# Altium PCB April12_RevB_PCB.PcbDoc
Units mil, origin at the board's own origin, x right, y up, seen from the top; angles counter-clockwise.
Board outline 1535 x 3155 mil, 2 copper layers (Top Layer, Bottom Layer); 35 components, 15 nets, 120 pads, 32 vias.
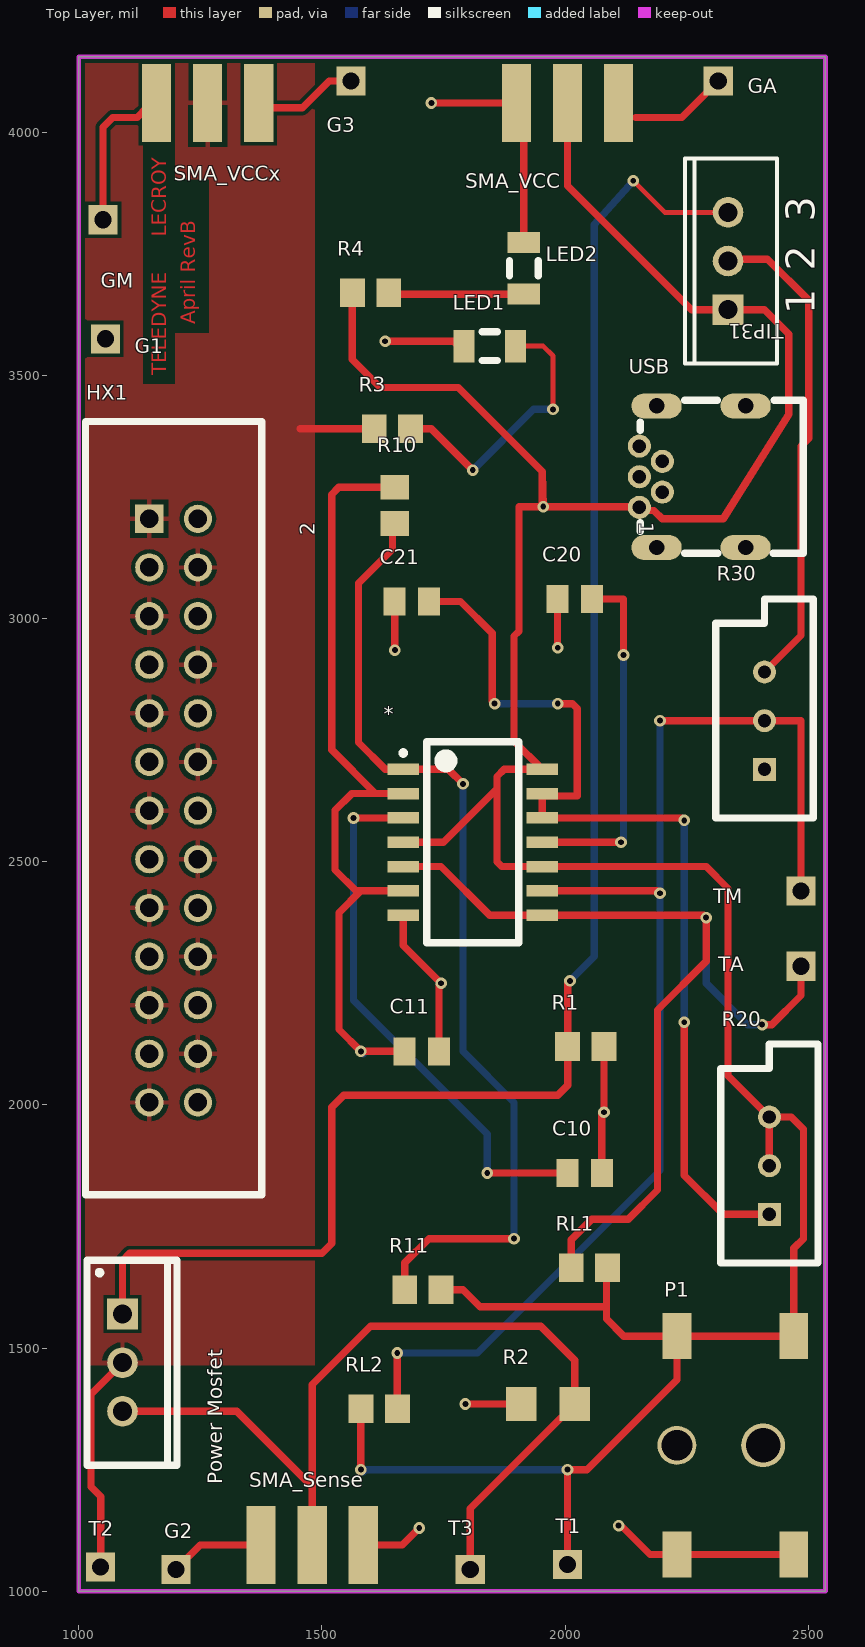
[diagram p0: Top Layer view]
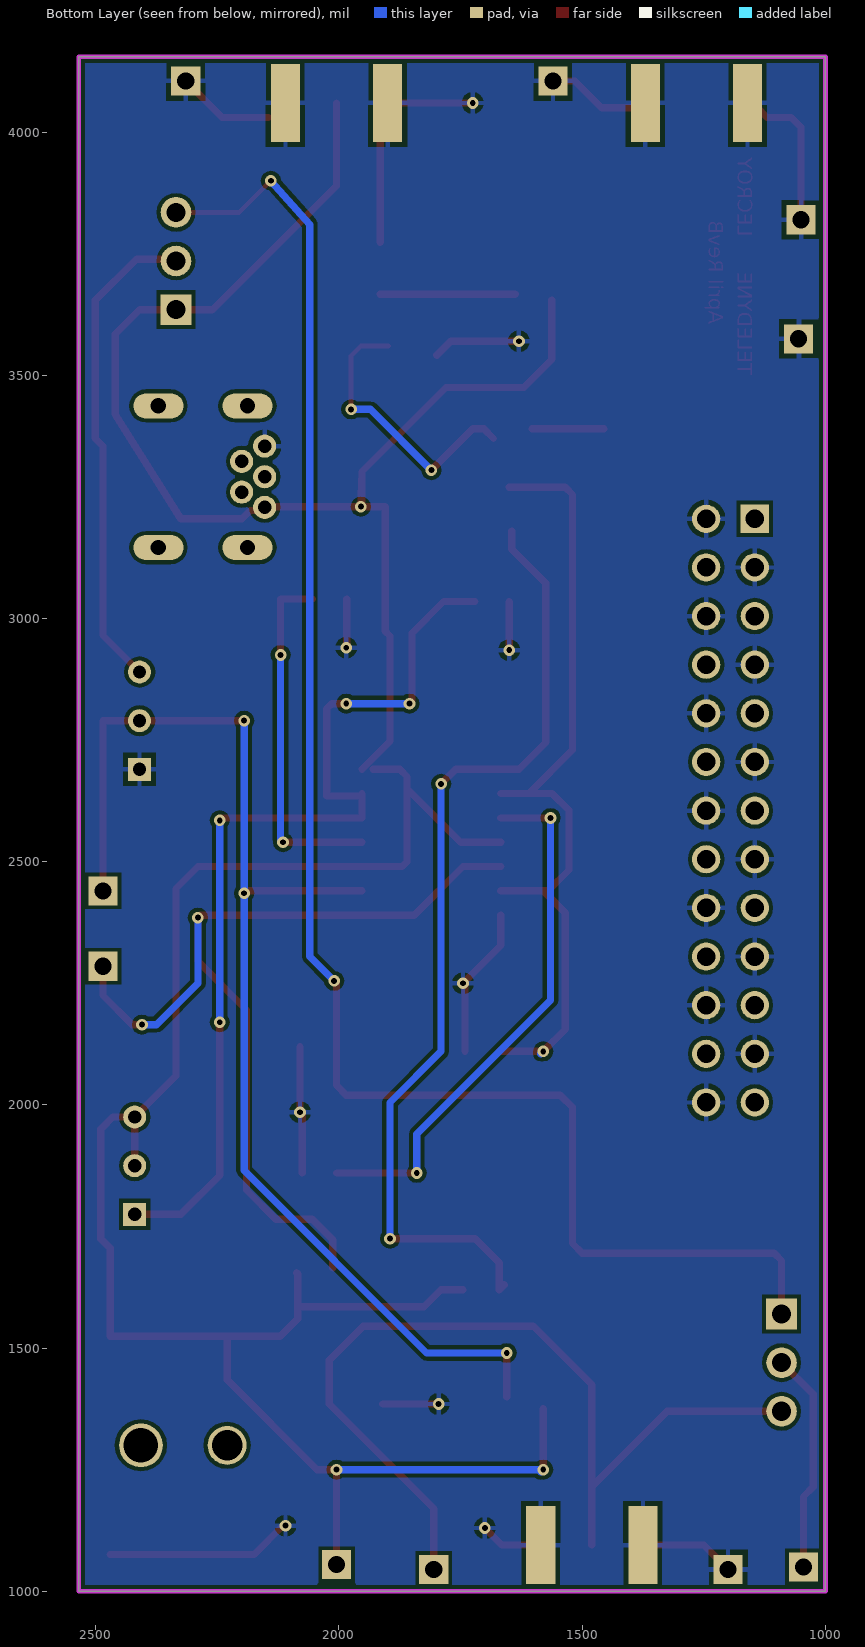
[diagram p1: Bottom Layer view, seen from below]

## Layer stack, top to bottom
Top Solder: solder mask 0.4, Solder Resist, Dk 3.5
Top Layer: signal copper 1.4
Dielectric 1: dielectric 12.6, FR-4, Dk 4.8
Bottom Layer: signal copper 1.4
Bottom Solder: solder mask 0.4, Solder Resist, Dk 3.5

## Board outline
1000,1000 2535,1000 2535,4155 1000,4155

## Design rules (kind name [scope] priority, off if disabled: settings)
Clearance [All] p1: gap=8 ignorepadtopadclearanceinfootprint=FALSE except(0: Arc-Hole Track-Hole SMDPad-Hole THPad-Hole Via-Hole Fill-Hole Poly-Hole Region-Hole Text-Hole)
PolygonConnect [All] p1: connectstyle=Relief reliefconductorwidth=10 reliefentries=4 polygonreliefangle="90 Angle" airgapwidth=10
RoutingVias [All] p1: holewidth=12 width=24 viastyle="Through Hole" minholewidth=12 minwidth=24 maxholewidth=12 maxwidth=24
SolderMaskExpansion [All] p1: expansion=4
Width [All] p1: maxlimit=20 minlimit=10 preferedwidth=10 minimp=50.000000 maximp=50.000000 favimp=50.000000
30 further rules are at their usual default settings.

## Components (designator, comment, footprint, x,y, rotation, side; value= is the part's Value field where it differs from the comment)
* "556" "556 timer" 1810,2540 r0 top
C10 "Cap Semi" CAPC2012X140N 2040,1860 r0 top value=0.01uF
C11 "Cap Semi" CAPC2012X140N 1705.43,2110 r0 top value=10uF
C20 "Cap Semi" CAPC2012X140N 2019.57,3040 r0 top value=0.01uF
C21 "Cap Semi" CAPC2012X140N 1685,3035 r0 top value=10uF
G1 "VCC" "1Pin Header" 1055,3575 r0 top
G2 "VCCx" "1Pin Header" 1200,1045 r0 top
G3 "Sense" "1Pin Header" 1560,4105 r0 top
GA "VCCx" "1Pin Header" 2315,4105 r0 top
GM "VCC" "1Pin Header" 1050,3820 r0 top
HX1 "1761606-9" TYCO_1761606-9 1245,3205 r90 top
LED1 "LED2" C1206 1845,3560 r180 top
LED2 "LED2" C1206 1915,3720 r90 top
P1 "PJ-002AH-SMT-TR" CUI_PJ-002AH-SMT-TR 2350,1300 r0 top
"Power Mosfet" "NMOS-2" TO-220AB 1090,1470 r270 top
R1 "Res3" RESC2012X70 2042.6,2120 r0 top value=100
R2 "0.1ohm" RESC3216X65 1964.88,1385 r180 top
R3 "Res3" RESC2012X70 1645,3390 r180 top value=1K
R4 "Res3" RESC2012X70 1600,3670 r180 top value=1K
R10 "Res3" RESC2012X70 1650,3232.4 r270 top value=440
R11 "Res3" RESC2012X70 1707.6,1620 r0 top value=560
R20 "RPot" VR5 2420,1875 r90 top value=10
R30 "RPot" VR5 2410,2790 r90 top value=10K
RL1 "Res3" RESC2012X70 2050,1665 r0 top value=10K
RL2 "Res3" RESC2012X70 1617.6,1375 r0 top value=10k
SMA_Sense "SMA3" sma_UserDefined 1220,1235 r180 top
SMA_VCC "SMA1" sma_UserDefined 1745,4200 r180 top
SMA_VCCx "SMA2" sma_UserDefined 1525,3920 r0 top
T1 "VCC" "1Pin Header" 2005,1055 r0 top
T2 "VCCx" "1Pin Header" 1045,1050 r0 top
T3 "Sense" "1Pin Header" 1805,1045 r0 top
TA "VCC" "1Pin Header" 2485,2285 r0 top
TIP31 "NPN" TO-220-AB 2335,3735 r90 top
TM "VCC" "1Pin Header" 2485,2440 r0 top
USB "USB" 651005136521_651005136521(Primary) 2188.19,3291.5 r270 top

## Footprints (in the part's own frame and the unit in brackets; to place one, negate y for a bottom-side part, rotate by r counter-clockwise, add the part's x,y. Pads: shape width x height; smd on the part's side, far side on the other; paste and mask are expansions set on the pad)
"1Pin Header" [mil]
  rect 60x60 hole 35.43: 1(0,0)
"556 timer" [mm]
  rect 1.65x0.6 smd: 1(-3.625,3.81) 2(-3.625,2.54) 3(-3.625,1.27) 4(-3.625,0) 5(-3.625,-1.27) 6(-3.625,-2.54) 7(-3.625,-3.81) 8(3.625,-3.81) 9(3.625,-2.54) 10(3.625,-1.27) 11(3.625,0) 12(3.625,1.27) 13(3.625,2.54) 14(3.625,3.81)
  silkscreen extent -3.75,-5.25 2.4,5.25, body extent -2.8,-5.25 2.8,5.25, height 2
651005136521_651005136521(Primary) [mm]
  round 1.208 hole 0.7: 1(1.6,-0.9) 2(0.8,0.3) 3(0,-0.9) 4(-0.8,0.3) 5(-1.6,-0.9)
  oval 1.308x2.616 hole 0.8: SHELL(-3.7,0) SHELL1(3.7,0) SHELL2(-3.7,4.65) SHELL3(3.7,4.65)
  silkscreen extent -4,-0.85 4,7.65
C1206 [mm] "Chip Capacitor, Body 3.2x1.6mm, IPC High Density"
  rect 1.1x1.7 smd: 1(-1.35,0) 2(1.35,0)
  silkscreen extent -0.4,-0.75 0.4,0.75, body extent -1.7,-0.9 1.7,0.9, height 1.3
CAPC2012X140N [mm]
  rect 1.15x1.45 smd: 1(-0.9,0) 2(0.9,0)
CUI_PJ-002AH-SMT-TR [mm]
  rect 1.5x2.4 smd: 1(-3.05,5.7) 1(3.05,5.7) 2(-3.05,-5.7) 3(3.05,-5.7)
  round 2.032 hole 1.6 unplated: None(-3.05,0)
  round 2.286 hole 1.8 unplated: None(1.45,0)
RESC2012X70 [mm]
  rect 1.3x1.5 smd: 1(-0.95,0) 2(0.95,0)
RESC3216X65 [mm]
  rect 1.6x1.8 smd: 1(-1.4,0) 2(1.4,0)
sma_UserDefined [mil]
  rect 60x160 smd: GND1(-365,140) GND4(-155,140) P(-260,140)
  rect 60x160 smd far side: GND2(-365,140) GND3(-155,140)
TO-220-AB [mm] "TO, Thru-Hole, Vertical, Heatsink Mounted; 3 In-Line Leads; Pitch 2.54 mm"
  rect 1.6x1.6 hole 1: 1(-2.54,0)
  round 1.6 hole 1: 2(0,0) 3(2.54,0)
  silkscreen extent -5.35,-2.55 5.35,2.25
TO-220AB [mm] "TO, Thru-Hole, Vertical, Heatsink Mounted; 3 In-Line Leads; Pitch 2.54 mm"
  rect 1.6x1.6 hole 1: 1(-2.54,0)
  round 1.6 hole 1: 2(0,0) 3(2.54,0)
  silkscreen extent -5.35,-1.85 5.35,2.85, body extent -5.4,-1.9 5.4,2.9, height 19.3
TYCO_1761606-9 [mil]
  rect 58x58 hole 38: 1(0,100)
  round 58 hole 38: 2(0,0) 3(-100,100) 4(-100,0) 5(-200,100) 6(-200,0) 7(-300,100) 8(-300,0) 9(-400,100) 10(-400,0) 11(-500,100) 12(-500,0) 13(-600,100) 14(-600,0) 15(-700,100) 16(-700,0) 17(-800,100) 18(-800,0) 19(-900,100) 20(-900,0) 21(-1000,100) 22(-1000,0) 23(-1100,100) 24(-1100,0) 25(-1200,100) 26(-1200,0)
  silkscreen extent -1390,-131 200,231
VR5 [mm] "Thru-Hole; 3 Leads"
  rect 1.2x1.2 hole 0.7: 1(-2.54,0)
  round 1.2 hole 0.7: 2(0,0) 3(2.54,0)
  silkscreen extent -5.08,-2.54 6.35,2.54

## Part data
C10 C11 C20 C21: "Capacitor (Semiconductor SIM Model)", LatestRevisionDate=29-May-2009, LatestRevisionNote="IPC-7351 Footprint Added.", PackageDescription="Chip Capacitor", PackageReference=C1206, Published=8-Jun-2000, Publisher="Altium Limited"
G1 G2 G3 GA GM T1 T2 T3 TA TM: library part "1Pin Header"
HX1: "Header, Pin, Idc, Amp-Latch, 26 Pos, Low Profile, Pcb, Vertical, Black", Package=None, Availability=Good, EU_RoHS_Compliance=Compliant, Link=http://www.te.com/usa-en/product-1761606-9.html, MF="TE Connectivity", MP=1761606-9, Price="4.02 USD", SnapEDA_Link=https://www.snapeda.com/symbols-footprints/1761606-9/TE%20Connectivity%20AMP%20Connectors/view-part/?ref=snap
LED1 LED2: "Typical RED, GREEN, YELLOW, AMBER GaAs LED", LatestRevisionDate=17-Jul-2002, LatestRevisionNote="Re-released for DXP Platform.", PackageDescription="SM LED; 2 Flat Leads", PackageReference=3.2X1.6X1.1, PackageVersion=Feb-2002, Published=8-Jun-2000, Publisher="Altium Limited"
P1: "24 VDC 5 A Surface Mount Unshielded 2 Conductors 3 Contacts Male Power Jack", Package=None, Availability=Good, MF=CUI, MP=PJ-002AH-SMT-TR, Price="1.03 USD", SnapEDA_Link=https://www.snapeda.com/symbols-footprints/PJ-002AH-SMT-TR/CUI%20Inc/view-part/?ref=snap
"Power Mosfet": "N-Channel Power MOSFET", ComponentLink1Description="Manufacturer Link", ComponentLink1URL=http://www.irf.com/, DatasheetVersion=PD-9.814, LatestRevisionDate=17-Jul-2002, LatestRevisionNote="Re-released for DXP Platform.", Note="Pin 2 is electrically connected to pin 4.", PackageDescription="TO, Thru-Hole, Vertical, Heatsink Mounted; 3 In-Line Leads; Pitch 2.54 mm", PackageReference=TO-220AB, PackageVersion=Feb-1997, Published=8-Jun-2000, Publisher="Altium Limited"
R1 R3 R4 R10 R11 RL1 RL2: "Resistor", LatestRevisionDate=29-May-2009, LatestRevisionNote="IPC-7351 Footprint Added.", PackageDescription="Chip Resistor", PackageReference=J1-0603, Published=8-Jun-2000, Publisher="Altium Limited"
R2: library part Res3, "Resistor", LatestRevisionDate=29-May-2009, LatestRevisionNote="IPC-7351 Footprint Added.", PackageDescription="Chip Resistor", PackageReference=J1-0603, Published=8-Jun-2000, Publisher="Altium Limited"
R20 R30: "Potentiometer", LatestRevisionDate=17-Jul-2002, LatestRevisionNote="Re-released for DXP Platform.", PackageDescription="Variable Resistor, Thru-Hole; 3 Leads", PackageReference=VR5, Published=8-Jun-2000, Publisher="Altium Limited", Set Position=0.5, Sim Note="Enter the Resistance value and the set point into parameter fields."
SMA_Sense SMA_VCC SMA_VCCx: library part 1865, "Edge-Launch SMA Connector for 1.6mm / 0.062 Thick PCBs", Package=None, Availability=Bad, MF=Keystone, MP=1865, Price="2.38 USD", SnapEDA_Link=https://www.snapeda.com/symbols-footprints/1865/Keystone%20Electronics/view-part/?ref=snap
TIP31: "NPN Bipolar Transistor", Code_JEDEC=TO-226-AA, LatestRevisionDate=17-Jul-2002, LatestRevisionNote="Re-released for DXP Platform.", PackageDescription="TO, Flat Index; 3 In-Line, Axial Leads; Body Dia. 4.8mm; Leads 0.55 x 0.51 mm (max)", PackageReference=TO-226-AA, Published=8-Jun-2000, Publisher="Altium Limited"
USB: library part 651005136521, "MINI USB A - 5POS Horizontal through hole", Package=None, Availability=Good, MF="Wurth Electronics", MP=651005136521, Price="1.78 USD", SnapEDA_Link=https://www.snapeda.com/symbols-footprints/651005136521/Wurth%20Electronics%20Inc/view-part/?ref=snap

## Via types
v1: diameter 24, hole 12, Top Layer to Bottom Layer, 32 vias

## Nets (pads, with @x,y where several pads share a name; then routed paths per layer and width w, separated by ;. In a path a pad name is that pad's centre, name@x,y a point inside that pad or via, vN(x,y) a via of type N, cw(c..) or ccw(c..) an arc to the next point about the centre after c; other vN are vias at no path point)
GND: *.7 C10.2 C11.2 C20.1 C21.1 G1.1 G2.1 G3.1 GA.1 GM.1 HX1.2 HX1.3 HX1.6 HX1.7 HX1.10 HX1.11 HX1.14 HX1.15 HX1.18 HX1.19 HX1.22 HX1.23 HX1.26 LED1.2 LED2.2 P1.2 P1.3 R1.2 R2.2 R30.1 SMA_Sense.GND1 SMA_Sense.GND2 SMA_Sense.GND3 SMA_Sense.GND4 SMA_VCC.GND1 SMA_VCC.GND2 SMA_VCC.GND3 SMA_VCC.GND4 SMA_VCCx.GND1 SMA_VCCx.GND2 SMA_VCCx.GND3 SMA_VCCx.GND4 USB.5 | length 2948.8
  Top Layer w15: GM.1 1050,4010 1070,4030 1120,4030 SMA_VCCx.GND1@1140,4050 ; G2.1 1250,1095 SMA_Sense.GND4 ; SMA_VCCx.GND4@1350,4050 1460,4050 1515,4105 G3.1 ; SMA_Sense.GND1 1665,1095 v1(1700,1130) ; v1(1630,3570) 1770.31,3570 LED1.2@1798.75,3541.56 ; C21.1 1649.57,2935.43 v1(1650,2935) ; *.7 1667.28,2327.72 v1(1745,2250) 1740.87,2245.87 C11.2 ; v1(1725,4060) SMA_VCC.GND4 ; v1(1795,1385) R2.2 ; LED2.2 SMA_VCC.GND4@1915,4035 ; C20.1 1984.13,2940.87 v1(1985,2940) ; C10.2 2075.43,1979.57 2080,1984.13 v1(2080,1985) R1.2 ; v1(2110,1135) 2115,1135 2174.41,1075.59 P1.2 P1.3 ; 2145,4030 2240,4030 GA.1
Net*_1: *.1 R10.2 R11.1 | length 2007.7
  Top Layer w15: R10.2@1645,3180 1645,3142.6 1575,3072.6 1575,2745 1630,2690 *.1 1760,2690 v1(1790,2660) ; R11.1@1660,1630.2 R11.1 1670.2,1675.2 1720,1725 v1(1895,1725)
  Bottom Layer w15: v1(1790,2660) 1790,2110 1895,2005 v1(1895,1725)
Net*_2: *.2 *.6 C11.1 R10.1 | length 1688.1
  Top Layer w15: R10.1 1534.8,3269.8 1520,3255 1520,2730 1610,2640 ; *.6 1580,2440 ; *.2 1610,2640 ; C11.1 v1(1580,2110) 1535,2155 1535,2395 1580,2440 ; 1580,2440 1570,2440 1527,2483 1527,2605.74 1561.26,2640 1610,2640
  Bottom Layer w15: v1(1580,2110) v1@1585,2105
Net*_3: *.3 C10.1 | length 1110.8
  Top Layer w15: v1(1565,2590) *.3 ; v1(1840,1860) C10.1
  Bottom Layer w15: v1(1565,2590) 1565,2215 1840,1940 v1(1840,1860)
Net*_5: *.5 *.8 RL1.1 TA.1 | length 1995.1
  Top Layer w15: *.5 1745,2490 1845,2390 *.8 2285,2390 v1(2290,2385) 2290,2295 2190,2195 2190,1825 2130,1765 2055,1765 2012.6,1722.6 RL1.1 ; v1(2405,2165) 2425,2165 2485,2225 TA.1
  Bottom Layer w15: v1(2290,2385) 2290,2250 2375,2165 v1(2405,2165)
Net*_9: *.9 R30.2 RL2.2 TM.1 | length 2594.7
  Top Layer w15: RL2.2@1655,1400 v1(1655,1490) ; *.9 2190,2440 v1(2195,2435) ; v1(2195,2790) R30.2 2485,2790 TM.1
  Bottom Layer w15: v1(1655,1490) 1820,1490 2195,1865 v1(2195,2435) v1(2195,2790)
Net*_11: *.11 C20.2 | length 729.4
  Top Layer w15: *.11 v1(2115,2540) ; C20.2 2120,3040 v1(2120,2925)
  Bottom Layer w15: v1(2115,2540) 2120,2545 v1(2120,2925)
Net*_12: *.12 *.13 C21.2 R20.1 | length 2014.6
  Top Layer w15: C21.2 1785,3035 1850,2970 1850,2830 v1(1855,2825) ; v1(1985,2825) 2015,2825 2025,2815 2025,2635 1957.72,2635 *.13 *.12 2240,2590 v1(2245,2585) ; v1(2245,2170) 2245,1855 2325,1775 R20.1
  Bottom Layer w15: v1(1855,2825) v1(1985,2825) ; v1(2245,2170) v1(2245,2585)
NetLED1_1: LED1.1 R3.1 | length 583
  Top Layer w10: LED1.1 1955,3560 1975,3540 v1(1975,3430)
  Top Layer w15: R3.1@1682.4,3370 1702.4,3390 1725,3390 v1(1810,3305)
  Bottom Layer w15: v1(1810,3305) 1935,3430 v1(1975,3430)
NetLED2_1: LED2.1 R4.1 | length 277.6
  Top Layer w15: R4.1@1637.4,3666.85 LED2.1
"NetPower Mosfet_1": "Power Mosfet.1" R1.1 TIP31.3 | length 3493.3
  Top Layer w10: v1(2140,3900) 2205,3835 TIP31.3 TIP31.3@2355,3835
  Top Layer w15: 1090,1570 1090,1680 1105,1695 1500,1695 1520,1715 1520,1995 1545,2020 1985,2020 2005.2,2040.2 R1.1 2005.2,2250.2 v1(2010,2255)
  Bottom Layer w15: v1(2010,2255) 2060,2305 2060,3810 v1(2140,3900)
"NetPower Mosfet_3": "Power Mosfet.3" R2.1 SMA_Sense.P T3.1 | length 1922
  Top Layer w15: 1090,1370 1325,1370 1480,1215 ; SMA_Sense.P 1480,1215 ; T3.1 1805,1170 R2.1 2020,1475 1950,1545 1600,1545 1480,1425 1480,1215
NetR30_3: R30.3 TIP31.2 | length 998.9
  Top Layer w15: TIP31.2@2338.76,3738.76 2416.24,3738.76 2500.84,3654.16 2500.84,3370 2485,3354.16 2485,2965 R30.3
VCC: *.4 *.10 *.14 P1.1 R4.2 R11.2 R20.2 R20.3 RL1.2 RL2.1 SMA_VCC.P T1.1 TIP31.1 USB.1 | length 7050.4
  Top Layer w15: R4.2@1562.6,3655 1562.6,3532.4 1620,3475 1780,3475 1952.72,3302.28 1952.72,3300 ; v1(1580,1250) RL2.1@1580,1375 ; *.4 1750,2540 1860,2650 ; R11.2 1790,1620 1825,1585 2085,1585 ; *.14@1930,2690 1875,2690 1860,2675 1860,2650 ; *.14 1895,2747.72 1895,2964.04 1905,2974.04 1905,3230 1952.72,3230 1952.72,3300 ; T1.1@1987.5,1037.5 T1.1 v1(2005,1250) 2045,1250 2229.92,1434.92 P1.1@2229.92,1524.41 ; SMA_VCC.P 2005,3890 2260,3635 TIP31.1 2410,3635 2460,3585 2460,3419.37 2325.31,3205 2199.45,3205 2182.36,3222.09 2159.17,3222.09 USB.1 ; RL1.2@2087.4,1655 2085,1652.6 2085,1585 ; USB.1@2165,3230 v1(1955,3230) 1952.72,3300 ; R20.2 R20.3 ; 1860,2650 1860,2500 1870,2490 *.10 2290,2490 2335,2445 2335,2060 R20.3 ; 2085,1585 2085,1560 2120.59,1524.41 P1.1@2229.92,1524.41 ; P1.1@2229.92,1524.41 2470.08,1524.41 2470.08,1705.08 2490,1725 2490,1950 2465,1975 R20.3
  Bottom Layer w15: v1(1580,1250) 1585,1245 1590,1250 v1(2005,1250)
VCCx: "Power Mosfet.2" HX1.1 HX1.4 HX1.5 HX1.8 HX1.9 HX1.12 HX1.13 HX1.16 HX1.17 HX1.20 HX1.21 HX1.24 HX1.25 R3.2 SMA_VCCx.P T2.1 | length 602.8
  Top Layer w15: T2.1 1045,1195 1025,1215 1025,1405 1090,1470 ; 1455,3390 R3.2@1602.6,3390
pads on no net: P1.None USB.2 USB.3 USB.4 USB.SHELL USB.SHELL1 USB.SHELL2 USB.SHELL3

## Polygon pours and split planes (outlines as drawn)
GND on Bottom Layer "HIHI" (solid, pour order 0): 1000,4155 2535,4155 2535,1000 1000,1000
VCCx on Top Layer "HIHI" (solid, pour order 2): 1485,4155 1485,1465 1000,1465 1000,3450 1000,4155

## Keep-outs
Keep-Out Layer:
  the board outline again, w10

## Other copper
Top Layer:
  text "LECROY" at 1180,3785 h30 r90
  text "April RevB" at 1240,3605 h30 r90
  text "TELEDYNE" at 1180,3500 h30 r90

## Text inside footprints (layer, text, board x,y; h text height)
HX1: Top Overlay "2" at 1485.46,3170.91 h30 r90; Mechanical 1 "2" at 1485.46,3170.91 h30 r90
TIP31: Top Overlay "1" at 2513.15,3625.16 h59.06 r90; Top Overlay "2" at 2513.15,3715.32 h59.06 r90; Top Overlay "3" at 2513.15,3815.32 h59.06 r90
USB: Top Overlay "1" at 2151.92,3198 h30 r270; Mechanical 1 "1" at 2151.91,3197.98 h30 r270; Mechanical 1 "5" at 2151.9,3399.66 h30 r270